# Altium PCB PCB1.PcbDoc
Units mil, origin at the board's own origin, x right, y up, seen from the top; angles counter-clockwise.
Board outline 1259.84 x 1615 mil, 2 copper layers (Top Layer, Bottom Layer); 48 components, 45 nets, 176 pads, 33 vias.
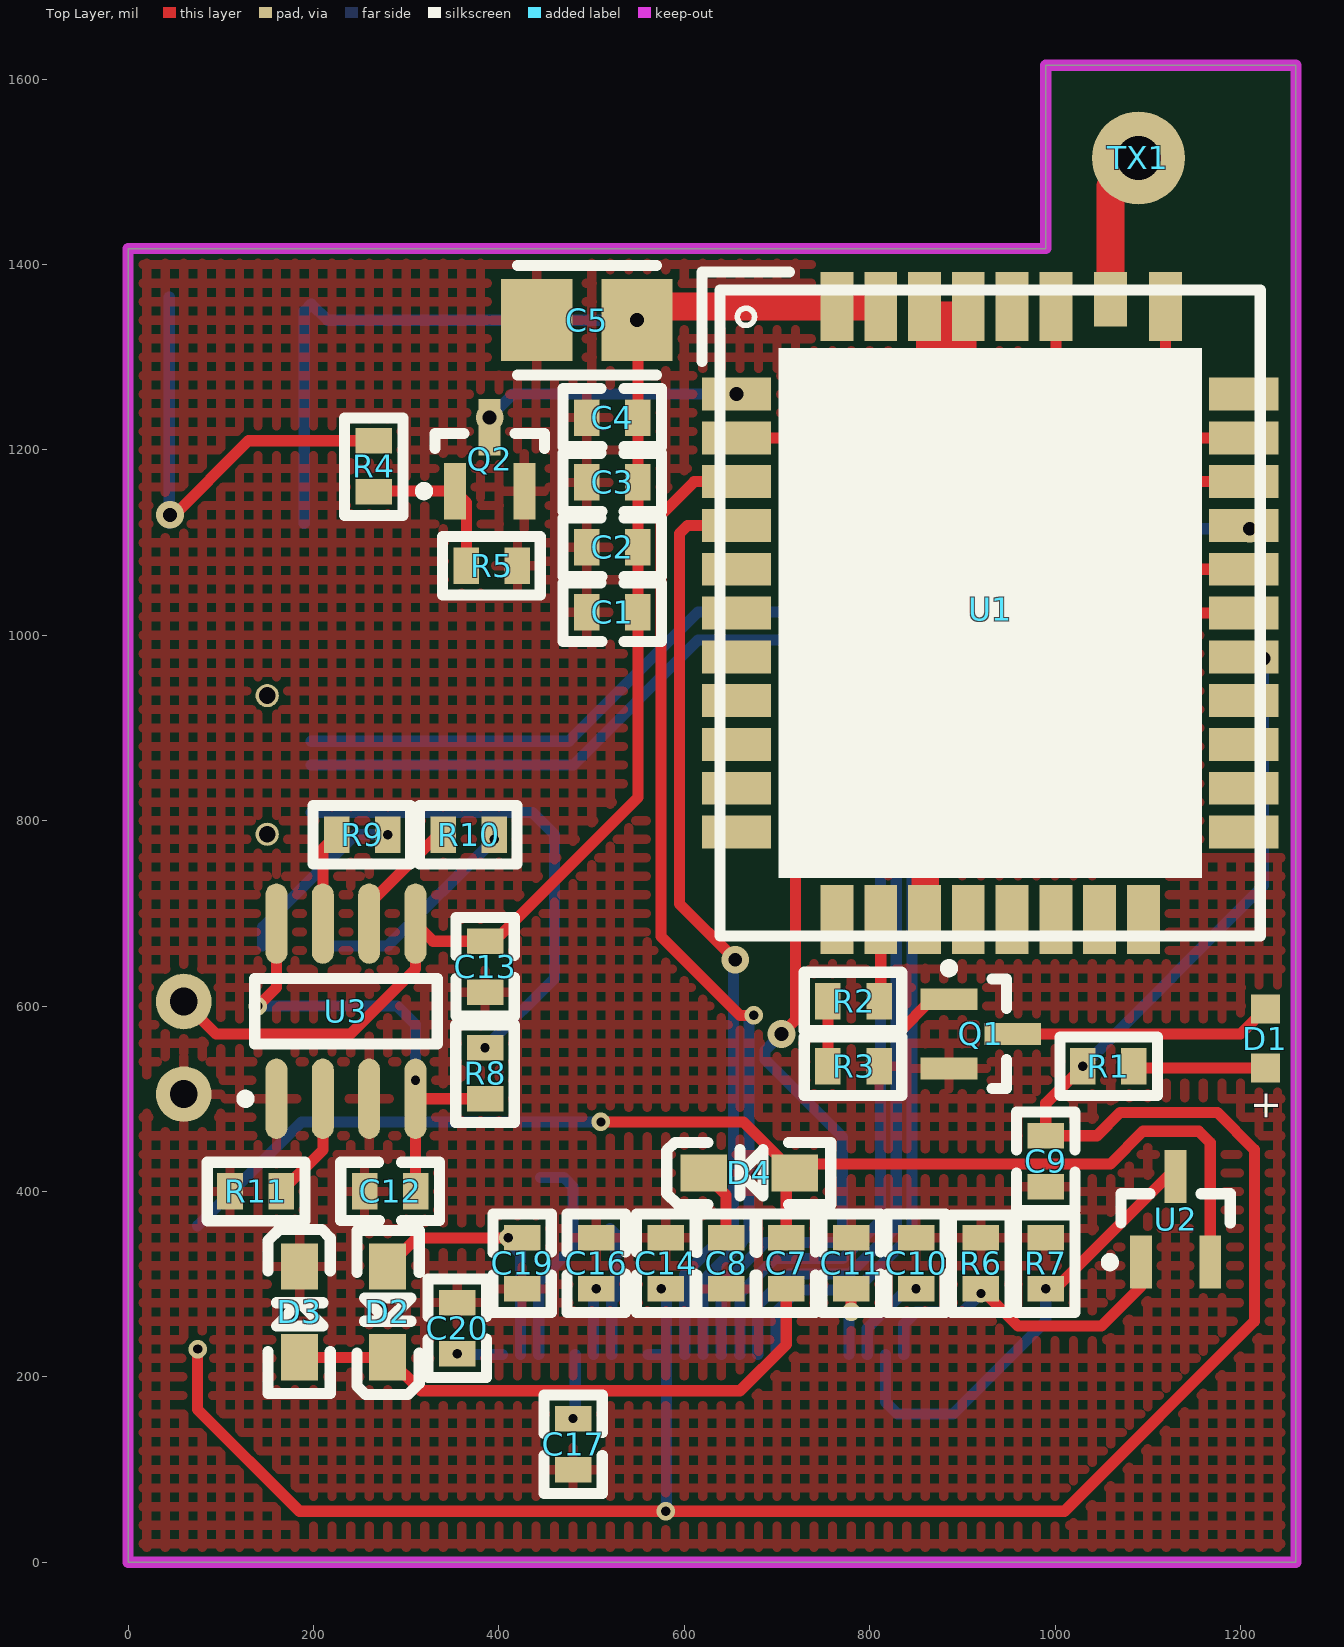
[diagram p0: Top Layer view]
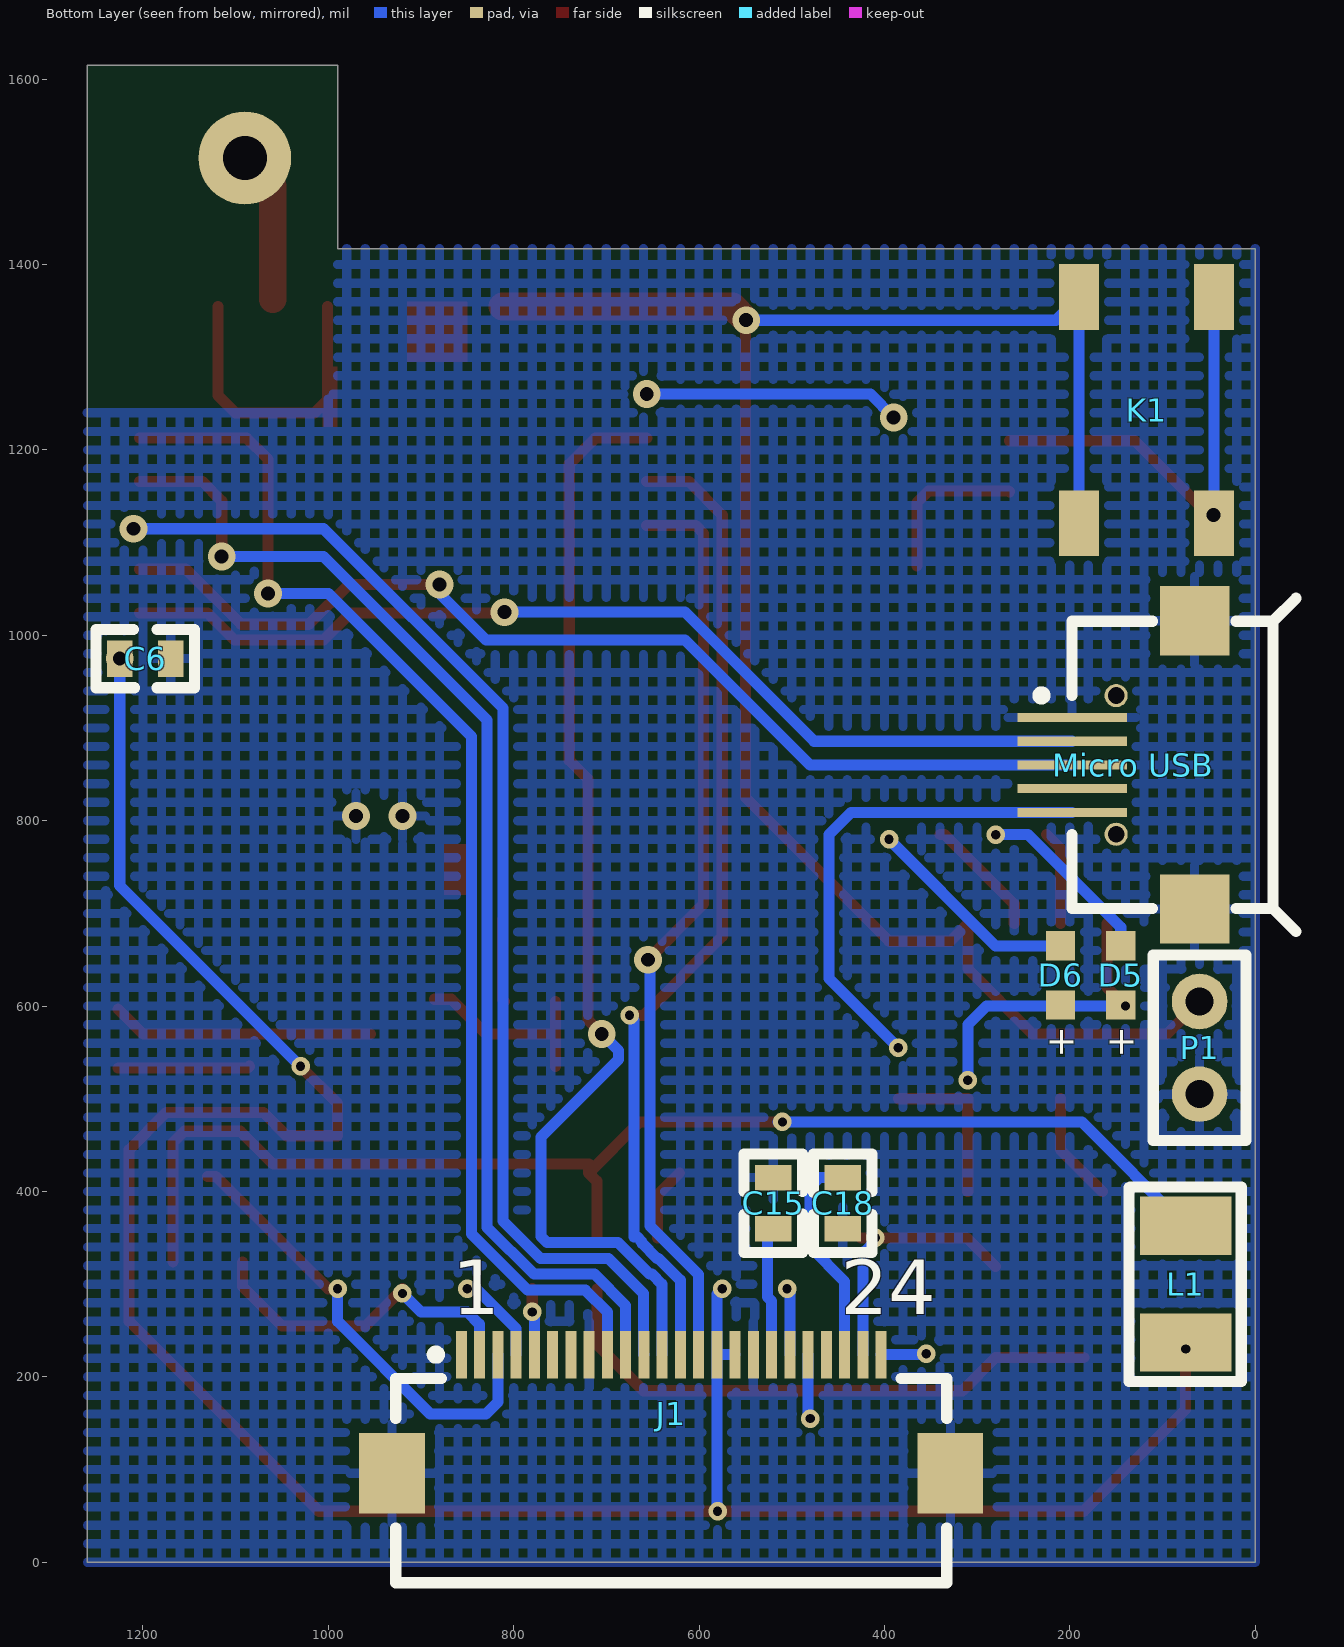
[diagram p1: Bottom Layer view, seen from below]
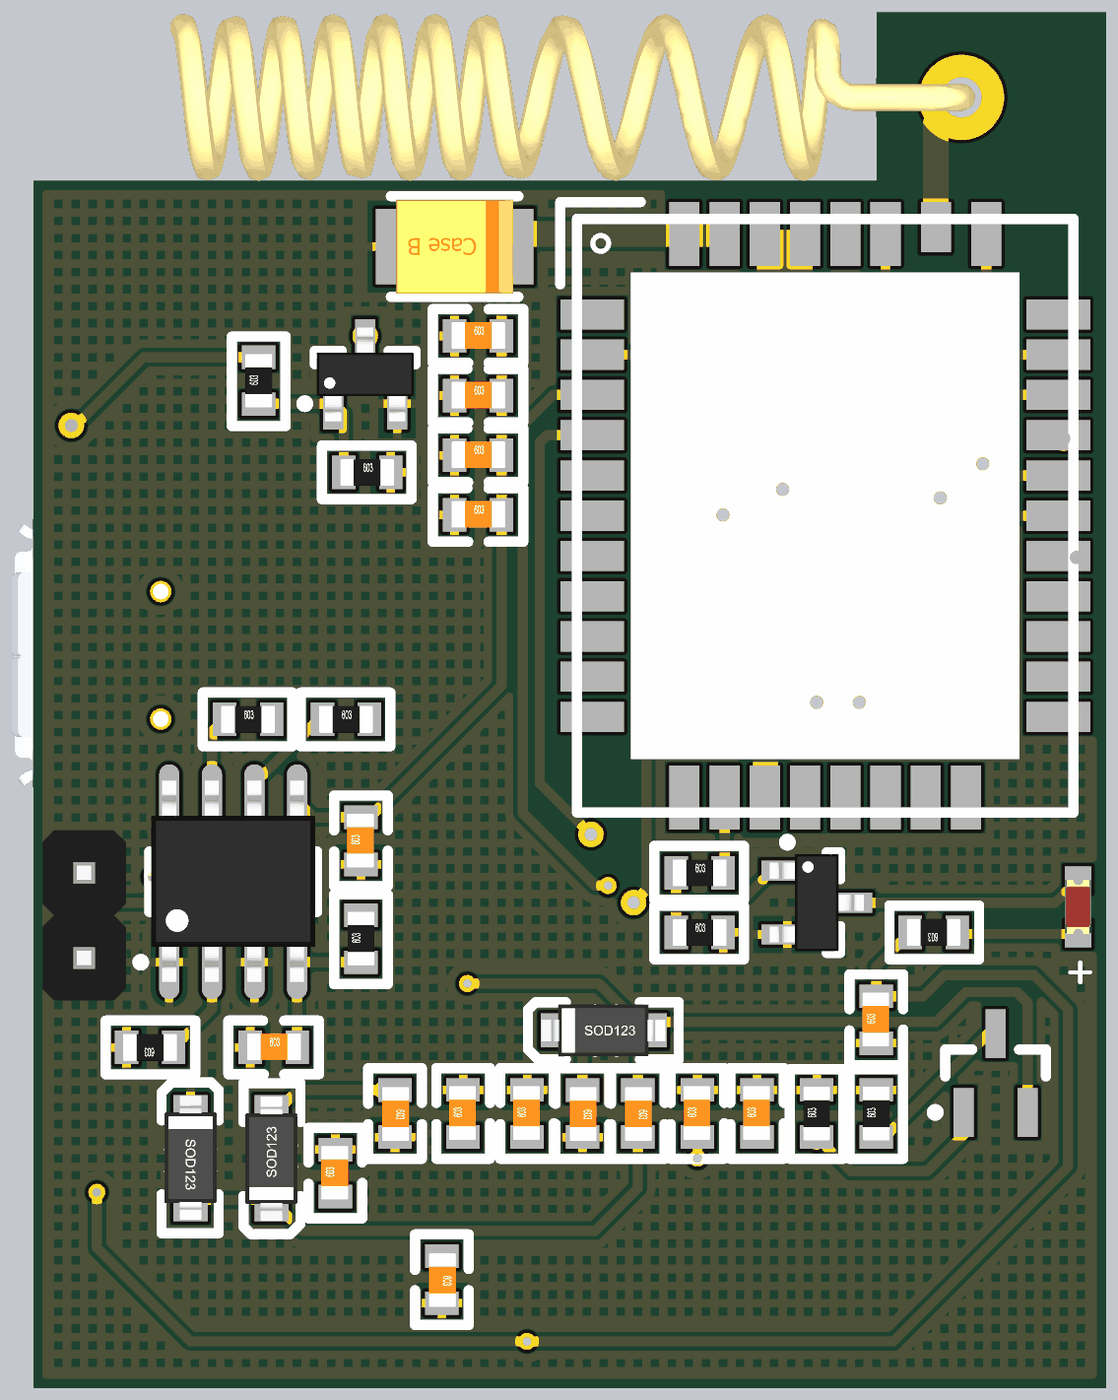
[diagram p2: 3D render of the assembled board from above, using the file's embedded part models]
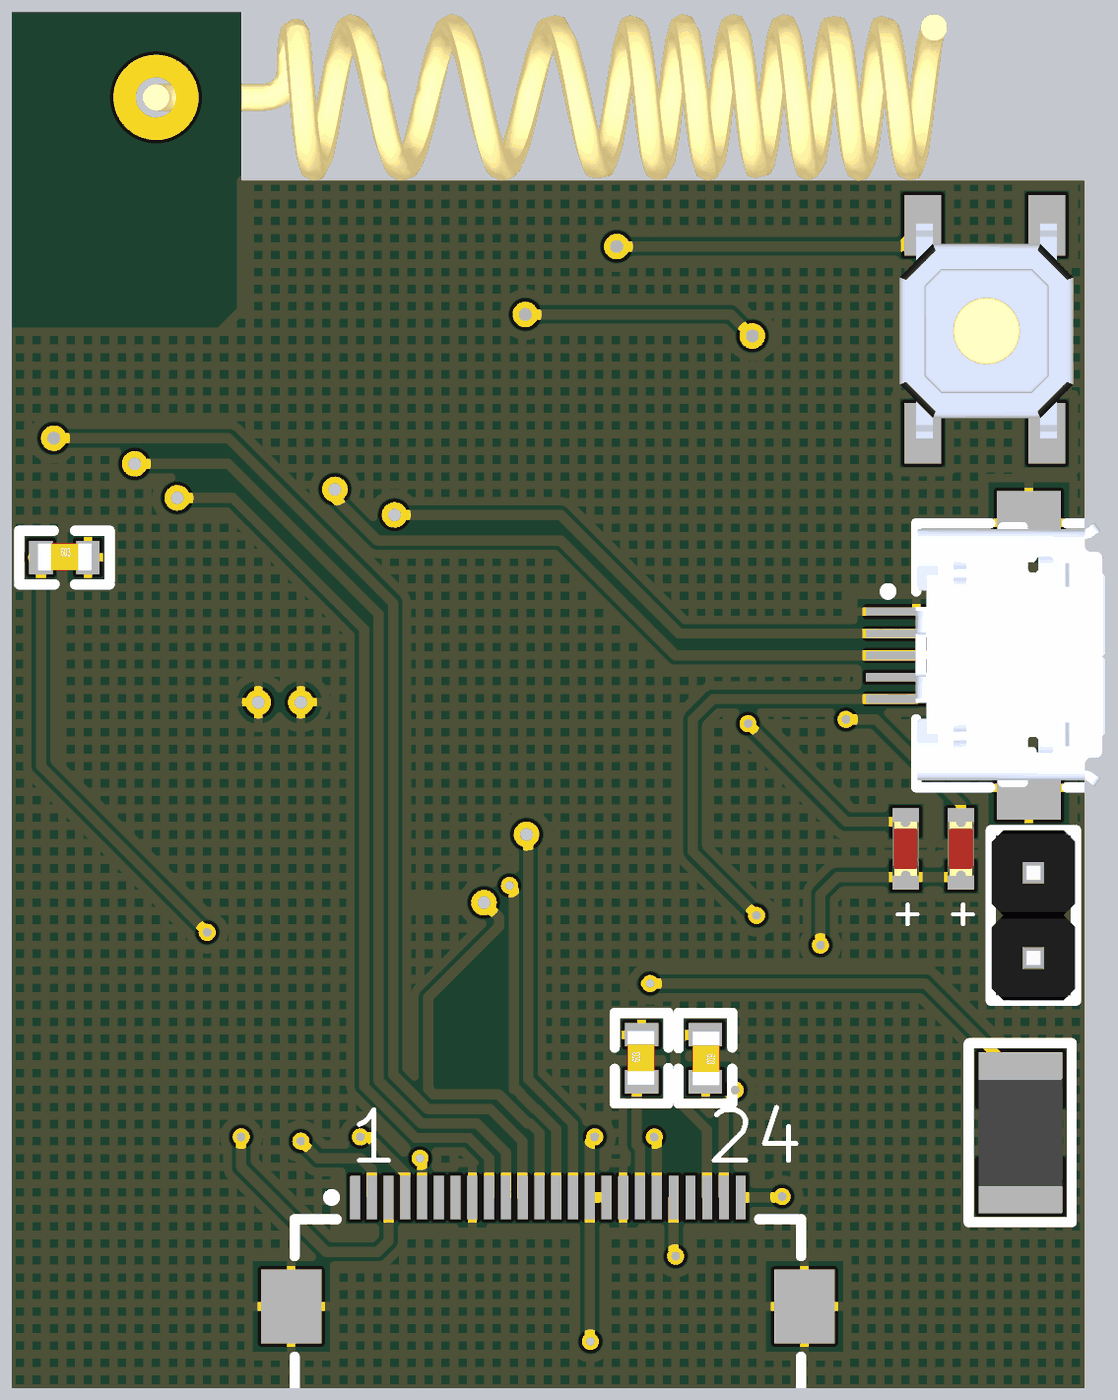
[diagram p3: 3D render of the assembled board from below, using the file's embedded part models]

## Layer stack, top to bottom
Top Solder: solder mask 0.4, Solder Resist, Dk 3.5
Top Layer: signal copper 1.4
Dielectric 1: dielectric 12.6, FR-4, Dk 4.8
Bottom Layer: signal copper 1.4
Bottom Solder: solder mask 0.4, Solder Resist, Dk 3.5

## Board outline
0,0 0,1417.32 990,1417.32 990,1615 1259.84,1615 1259.84,0

## Design rules (kind name [scope] priority, off if disabled: settings)
Clearance [All] p1: gap=5
ComponentClearance [All] p1: gap=5 collisioncheckmode=3 verticalgap=10 showdistances=FALSE
MinimumSolderMaskSliver [All] p1: minsoldermaskwidth=1
PolygonConnect [All] p1: connectstyle=Relief reliefconductorwidth=10 reliefentries=4 polygonreliefangle="90 Angle" airgapwidth=10
RoutingVias [All] p1: holewidth=28 width=50 viastyle="Through Hole" minholewidth=10 minwidth=50 maxholewidth=28 maxwidth=50
SilkToSilkClearance [All] p1: silktosilkclearance=0
SilkToSolderMaskClearance [IsPad] p1: minsilkscreentomaskgap=0 clearancetoexposedcopper=TRUE
SolderMaskExpansion [All] p1: expansion=4
Width [All] p1: maxlimit=50 minlimit=10 preferedwidth=12
26 further rules are at their usual default settings.

## Components (designator, comment, footprint, x,y, rotation, side; value= is the part's Value field where it differs from the comment)
C1 "无极性电容" 0603AC 494.88,1025 r0 top
C2 "无极性电容" 0603AC 494.88,1095 r0 top
C3 "无极性电容" 0603AC 494.88,1165 r0 top
C4 "无极性电容" 0603AC 494.88,1235 r0 top
C5 "贴片铝/钽电容" CAPM-B-3528X21N 495,1340 r180 top
C6 "无极性电容" 0603AC 1225,975 r180 bottom
C7 "无极性电容" 0603AC 710,350 r270 top
C8 "无极性电容" 0603AC 645,350 r270 top
C9 "无极性电容" 0603AC 990,405 r90 top
C10 "无极性电容" 0603AC 850,295 r90 top
C11 "无极性电容" 0603AC 780,295 r90 top
C12 "无极性电容" 0603AC 255,400 r0 top
C13 "无极性电容" 0603AC 385,614.88 r90 top
C14 "无极性电容" 0603AC 580,295 r90 top
C15 "无极性电容" 0603AC 520,359.88 r90 bottom
C16 "无极性电容" 0603AC 505,295 r90 top
C17 "无极性电容" 0603AC 480,155 r270 top
C18 "无极性电容" 0603AC 445,415 r270 bottom
C19 "无极性电容" 0603AC 425,350 r270 top
C20 "无极性电容" 0603AC 355,225 r90 top
D1 "LED-贴片" LED_0603 1225,520 r90 top
D2 "MBR0530" SOD123 280,270 r270 top
D3 "MBR0530" SOD123 185,270 r90 top
D4 "MBR0530" SOD123 670,420 r180 top
D5 "LED-贴片-直插" LED_0603 146.99,588.1 r90 bottom
D6 "LED-贴片-直插" LED_0603 211.99,588.1 r90 bottom
J1 "CL586-0555-2" FH12-24S-0.5SH 630,160 r180 bottom
K1 "KEY" KEY_4*4 190,1120.91 r90 bottom
L1 "LND" 3225 75,300 r90 bottom
"Micro USB" "Micro USB-B" "Micro USB" -19.29,860.2 r90 bottom
P1 "Header 2" "Header 2" 60,555 r90 bottom
Q1 "NPN" SOT95P230X110-3N 920,570 r0 top
Q2 "NPN" SOT95P230X110-3N 390,1190 r90 top
R1 "贴片电阻" 0603AR 1085,535.06 r180 top
R2 "贴片电阻" 0603AR 755,605 r0 top
R3 "贴片电阻" 0603AR 755,535 r0 top
R4 "贴片电阻" 0603AR 265,1154.88 r90 top
R5 "贴片电阻" 0603AR 364.88,1075 r0 top
R6 "贴片电阻" 0603AR 920,295 r90 top
R7 "贴片电阻" 0603AR 990,295 r90 top
R8 "贴片电阻" 0603AR 385,500 r90 top
R9 "贴片电阻" 0603AR 225,785 r0 top
R10 "贴片电阻" 0603AR 339.88,785 r0 top
R11 "贴片电阻" 0603AR 165,400 r180 top
TX1 "GSM/GPRS/3G弹簧天线" GSM/GPRS/3G弹簧天线 1090,1515 r180 top
U1 "A6391_A11" A6391_A11 638.66,675.63 r0 top
U2 "Si1304BDL" AO3400 1130,370 r90 top
U3 "TP4056" SOP8LM386 160,500 r90 top

## Footprints (in the part's own frame and the unit in brackets; to place one, negate y for a bottom-side part, rotate by r counter-clockwise, add the part's x,y. Pads: shape width x height; smd on the part's side, far side on the other; paste and mask are expansions set on the pad)
0603AC [mm]
  rect 0.7x1 smd: 1(0,0) 2(1.4,0)
  silkscreen extent -0.65,-0.8 2.05,0.8, body extent -0.09,-0.38 1.51,0.42, height 0.3
0603AR [mm]
  rect 0.7x1 smd: 1(0,0) 2(1.4,0)
  silkscreen extent -0.65,-0.8 2.02,0.8, body extent -0.1,-0.4 1.5,0.4, height 0.3
3225 [mm]
  rect 1.6x2.5 smd: 1(-1.6,0) 2(1.6,0)
  silkscreen extent -2.67,-1.52 2.67,1.55, body extent -1.6,-1.25 1.6,1.25, height 2
A6391_A11 [mm]
  rect 1.9x0.9 smd: 1(0.45,14.85) 2(0.45,13.65) 3(0.45,12.45) 4(0.45,11.25) 5(0.45,10.05) 6(0.45,8.85) 7(0.45,7.65) 8(0.45,6.45) 9(0.45,5.25) 10(0.45,4.05) 11(0.45,2.85) 20(14.35,2.85) 21(14.35,4.05) 22(14.35,5.25) 23(14.35,6.45) 24(14.35,7.65) 25(14.35,8.85) 26(14.35,10.05) 27(14.35,11.25) 28(14.35,12.45) 29(14.35,13.65) 30(14.35,14.85)
  rect 0.9x1.9 smd: 12(3.2,0.45) 13(4.4,0.45) 14(5.6,0.45) 15(6.8,0.45) 16(8,0.45) 17(9.2,0.45) 18(10.4,0.45) 19(11.6,0.45) 31(12.2,17.25) 33(9.2,17.25) 34(8,17.25) 35(6.8,17.25) 36(5.6,17.25) 37(4.4,17.25) 38(3.2,17.25)
  rect 0.9x1.5 smd: 32(10.7,17.45)
  rect 1.5x1.5 smd: 39(3.2,2.85) 40(11.6,2.85) 41(7.4,7.35)
  Top Layer pour cut-out: 169 vertices and 0 holes, not listed, extent 9.5,15.8 11.9,18.2
  Top Layer pour cut-out: 13.2,15.5 15.5,15.5 15.5,2.2 13.2,2.2
  Top Layer pour cut-out: 2.5,1.6 12.3,1.6 12.3,-0.7 2.5,-0.7
  Top Layer pour cut-out: -0.7,15.5 1.6,15.5 1.6,2.2 -0.7,2.2
  Top Layer pour cut-out: 2.6,18.4 8.7,18.4 8.7,16.1 2.6,16.1
  silkscreen extent -0.5,0 14.8,18.2
AO3400 [mm]
  rect 1.45x0.6 smd: 1(-1.175,0.95) 2(-1.175,-0.95) 3(1.175,0)
  silkscreen extent -1.3,-1.5 0.7,1.92, body extent -0.7,-1.5 0.7,1.5, height 1.1
CAPM-B-3528X21N [mm] "Molded Capacitor, 2-Leads, Body 3.50x2.80mm, IPC Medium Density"
  rect 1.95x2.25 smd: 1(-1.375,0) 2(1.375,0)
  silkscreen extent -1.9,-1.5 1.9,1.5, body extent -1.75,-1.4 1.75,1.4, height 1.9
FH12-24S-0.5SH [mm] "Connector; FH12 Series; 24 Position; 0.5mm Spaced Bottom Contact"
  rect 0.3x1.3 smd: 1(-5.75,1.625) 2(-5.25,1.625) 3(-4.75,1.625) 4(-4.25,1.625) 5(-3.75,1.625) 6(-3.25,1.625) 7(-2.75,1.625) 8(-2.25,1.625) 9(-1.75,1.625) 10(-1.25,1.625) 11(-0.75,1.625) 12(-0.25,1.625) 13(0.25,1.625) 14(0.75,1.625) 15(1.25,1.625) 16(1.75,1.625) 17(2.25,1.625) 18(2.75,1.625) 19(3.25,1.625) 20(3.75,1.625) 21(4.25,1.625) 22(4.75,1.625) 23(5.25,1.625) 24(5.75,1.625)
  rect 1.8x2.2 smd: 25(-7.65,-1.625) 26(7.65,-1.625)
  silkscreen extent -7.55,-4.62 7.55,1.75
GSM/GPRS/3G弹簧天线 [mm]
  round 2.54 hole 1.2: 1(0,0)
  body extent -0.4,-2.49 23.59,2.49, height 2.96
"Header 2" [mil]
  round 60 hole 30: 1(-50,0) 2(50,0)
  silkscreen extent -100,-50 100,50, body extent -100,-49 100,49, height 285
KEY_4*4 [mm]
  rect 1.8x1.1 smd: 1(0,0) 1(6.2,0) 2(0,-3.7) 2(6.2,-3.7)
  body extent -0.15,-4.5 6.25,0.7, height 1.5
LED_0603 [mm]
  rect 0.8x0.8 smd: 1(0.333,-0.051) 2(1.953,-0.051)
  body extent 0.33,-0.45 1.95,0.35, height 0.6
"Micro USB" [mm]
  rect 0.25x3 smd: 0(-0.65,5.508) 1(-1.3,5.508) 2(0.65,5.508) 3(0,5.508) 4(1.3,5.508)
  round 0.635 hole 0.457 unplated: MH1(1.9,4.3) MH2(-1.9,4.3)
  rect 1.9x1.9 smd: ""(-3.95,2.15) ""(3.95,2.15)
  silkscreen extent -4.57,-0.63 4.57,6.47, body extent -3.94,-0.14 3.98,5.52, height 3.09
SOD123 [mil]
  rect 50x40 smd: 1(-49,0) 2(49,0)
  silkscreen extent -88,-33 89,34, body extent -72,-31 73,31, height 53
SOP8LM386 [mm]
  oval 2.2x0.6 smd: 1(0,0) 2(0,-1.27) 3(0,-2.54) 4(0,-3.81) 5(4.8,-3.81) 6(4.8,-2.54) 7(4.8,-1.27) 8(4.8,0)
  silkscreen extent -0.12,-4.41 3.3,0.97, body extent -0.59,-4.36 5.41,0.55, height 1.75
SOT95P230X110-3N [mm] "SOT23, 3-Leads, Body 2.92x2.30mm, Pitch 0.95mm, IPC Medium Density"
  rect 1.55x0.6 smd: 1(-0.875,0.95) 2(-0.875,-0.95) 3(0.875,0)
  silkscreen extent -1,-1.5 0.7,1.92, body extent -1.4,-1.45 1.4,1.45, height 1.3

## Part data
C1: "0603;0.1uF"
C2: "0603;33pF"
C3: "0603;18pF"
C4: "0603;22pF"
C5: "Polarized Capacitor (Axial)"
C6: "0603;1uF"
C7 C8 C9 C10 C11 C12 C13 C14 C15 C16 C17 C18 C19 C20: "Capacitor"
D1: library part LED-贴片-直插, "0603;LED"
D2 D3 D4: library part 二极管
J1: "FH12 Series, \"Flip-Lock\" SMT/ZIF Connector - 0.5mm Spaced Top Contact"
P1: library part "Header 2_1", "DIP 2.54"
Q1 Q2: library part NPN_1, "NPN;SOT95P230X110-3N"
R1: "0603;1K"
R2 R4: "0603;4.7K"
R3 R5 R6 R7: "0603;10K"
R8 R9 R10 R11: "Resistor"
U1: "202оƬ"
U2: library part AO3400

## Via types
v1: diameter 20, hole 10, Top Layer to Bottom Layer, 19 vias
v2: diameter 30, hole 15, Top Layer to Bottom Layer, 14 vias

## Nets (pads, with @x,y where several pads share a name; then routed paths per layer and width w, separated by ;. In a path a pad name is that pad's centre, name@x,y a point inside that pad or via, vN(x,y) a via of type N, cw(c..) or ccw(c..) an arc to the next point about the centre after c; other vN are vias at no path point)
BS1: "Micro USB.4" "Micro USB." C1.1 C2.1 C3.1 C4.1 C5.2 C6.2 C8.2 C9.1 C10.2 C11.2 C12.1 C13.1 C14.2 C15.2 C16.2 C17.2 C18.2 C19.2 C20.2 D3.2 J1.8 J1.17 J1.25 J1.26 P1.1 Q1.2 Q2.2 R3.2 R5.2 R6.2 R7.2 R11.2 U1.14 U1.31 U1.33 U1.35 U1.36 U1.39 U1.40 U1.41 U3.1 U3.3 | length 328.2
  Top Layer w12: U1.33 1000.87,1254.13 1015,1240 1100,1240 1118.98,1258.98 U1.31
  other v2: 920,805 970,805
BUSY: J1.9 U1.29 | length 1340.4
  Top Layer w12: v2(1065,1045) 1065,1190 1088.03,1213.03 U1.29
  Bottom Layer w12: J1.9 698.9,269.86 722.83,293.79 785.17,293.79 845.61,354.22 845.61,890.61 1000,1045 v2(1065,1045)
CS#: J1.12 U1.2 | length 1213.3
  Top Layer w12: U1.2 711.97,1213.03 740,1185 740,865 720,845 720,585 v2(705,570)
  Bottom Layer w12: J1.12 639.84,299.84 650.79,310.79 653.62,310.79 687.62,344.79 764.04,344.79 770.49,351.23 770.49,458.77 687,542.26 687,552 v2(705,570)
D0: J1.13 U1.3 | length 1077.6
  Top Layer w12: U1.3 610.79,1165.79 575,1130 575,675 660,590 v1(675,590)
  Bottom Layer w12: J1.13 620.16,304.2 643.75,327.79 645.1,327.79 661.5,344.19 661.5,345.55 667.17,351.21 670,351.21 670,585 v1(675,590)
D1: J1.14 U1.4 | length 998.4
  Top Layer w12: v2(655,650) 595,710 595,1110 603.54,1118.54 U1.4
  Bottom Layer w12: J1.14 600.47,310.47 653,363 653,648 v2(655,650)
DC#: J1.11 U1.27 | length 1282.1
  Bottom Layer w12: J1.11 660,224.45 660,290 697.79,327.79 771.09,327.79 811.61,368.31 811.61,921.61 1005,1115 v2(1210,1115)
GDR: J1.2 R6.1 U2.1 | length 362.8
  Top Layer w12: R6.1 960,255 1050,255 1092.6,297.6 U2.1
  Bottom Layer w12: J1.2 836.69,256.69 850,270 900,270 v1(920,290)
HOST_RX: "Micro USB.2" U1.25 | length 1088.2
  Top Layer w12: v2(810,1025) 810.94,1024.06 975.94,1024.06 1005,995 1101.21,995 1130.27,1024.06 U1.25
  Bottom Layer w12: 197.56,885.79 475.79,885.79 615,1025 v2(810,1025)
HOST_TX: "Micro USB.3" U1.26 | length 1135
  Top Layer w12: v2(880,1055) 977.83,1055 1020.83,1012 1094.17,1012 1153.47,1071.3 U1.26
  Bottom Layer w12: 197.56,860.2 480.2,860.2 615,995 830,995 880,1045 v2(880,1055)
NC: J1.1
NET_LED: R2.2 U1.13 | length 89.1
  Top Layer w12: R2.2 811.89,606.77 U1.13
NetC7_1: C7.1 D4.1 L1.2 U2.2 | length 1398.7
  Top Layer w12: v1(510,475) 664,475 D4.1 ; C7.1 710,411 D4.1 ; U2.2 1167.4,452.6 1155,465 1095,465 1059.78,429.78 719,429.78 D4.1
  Bottom Layer w12: L1.2 187.01,475 v1@515,475
NetC7_2: C7.2 D2.2 D3.1 | length 620.5
  Top Layer w12: D3.1 D2.2 316,185 660,185 710,235 C7.2
NetC8_1: C8.1 D4.2 | length 79.9
  Top Layer w12: D4.2 645,396 C8.1
NetC12_2: C12.2 D5.1 D6.1 R8.1 U3.4 U3.8 | length 510.6
  Top Layer w12: v1(140,600) 160,620 U3.8 ; C12.2 310.12,499.88 U3.4 R8.1
  Bottom Layer w12: v1(140,600) 290,600 310,580 v1(310,520)
NetD1_1: D1.1 R1.1 | length 142.8
  Top Layer w12: R1.1 1086.94,533.12 D1.1
NetD1_2: D1.2 Q1.3 | length 283.7
  Top Layer w12: Q1.3 1200.09,570 D1.2
NetD5_2: D5.2 R9.2 | length 196.4
  Bottom Layer w12: D5.2 145,685 245,785 v1(280,785)
NetD6_2: D6.2 R10.2 | length 232.6
  Bottom Layer w12: D6.2 280,665 v1(395,780)
NetK1_2: K1.2 R4.2 | length 499.3
  Top Layer w12: v2@45,1125 130,1210 R4.2
  Bottom Layer w12: K1.2@44.33,1120.91 K1.2@44.33,1365
  other v2: 45,1130
NetQ1_1: Q1.1 R2.1 R3.1 | length 216
  Top Layer w12: R3.1 755,570 ; R2.1 755,570 ; Q1.1 867.4,607.4 830,570 755,570
NetQ2_1: Q2.1 R4.1 R5.1 | length 173.5
  Top Layer w12: R4.1 265.67,1155.55 Q2.1 364.88,1143.27 R5.1
NetR9_1: R9.1 U3.7 | length 102.2
  Top Layer w12: U3.7 210,770 R9.1
NetR10_1: R10.1 U3.6 | length 132
  Top Layer w12: U3.6 260,710 335,785 R10.1
NetR11_1: R11.1 U3.2 | length 118.6
  Top Layer w12: R11.1 210,445 U3.2
NetTX1_1: TX1.1 U1.32 | length 164.8
  Top Layer w30: U1.32 1059.92,1484.92 TX1.1
POWERKEY: Q2.3 U1.1 | length 276.8
  Bottom Layer w12: v2(390,1235) 415.28,1260.28 v2(656.38,1260.28)
PREVGH: J1.21
PREVGI: C19.1 D2.1 J1.23 | length 280
  Top Layer w12: D2.1 311,350 v1(410,350) C19.1
  Bottom Layer w12: v1@414.31,341.55 420.76,335.1 422.17,335.1 423.31,333.97 J1.23
RES#: J1.10 U1.28 | length 1301.4
  Top Layer w12: v2(1115,1085) 1115,1145 1135.79,1165.79 U1.28
  Bottom Layer w12: J1.10 679.21,277.04 712.96,310.79 778.13,310.79 828.61,361.27 828.61,908.61 1005,1085 v2(1115,1085)
RESE: J1.3 R7.1 U2.3 | length 496
  Top Layer w12: v1(990,295) 1000,295 1121.26,416.26 U2.3
  Bottom Layer w12: J1.3 817.01,172.99 830,160 890,160 990,260 v1(990,295)
SPK_N: U1.16
SPK_P: U1.17
TSCL: J1.6
TSDA: J1.7
VBAT: C1.2 C2.2 C3.2 C4.2 C5.1 C13.2 K1.1 P1.2 U1.37 U1.38 U3.5 | length 2037.3
  Top Layer w12: P1.2 95,570 240,570 310,640 U3.5 328.98,670 C13.2 395,670 550,825 C1.2 C2.2 C3.2 C4.2 550,1339.13 v2(549.13,1340)
  Top Layer w30: v2(549.13,1340) 563.9,1354.76 U1.38 U1.37
  Bottom Layer w12: K1.1@190,1120.91 190,1350 197.5,1357.5 215,1340 v2(549.13,1340)
VCI: C6.1 C9.2 C14.1 J1.15 J1.16 L1.1 R1.2 U1.24 | length 2647
  Top Layer w12: v1(75,230) 75,165 185,55 1010,55 1215,260 1215,445 1175,485 1070,485 1045.12,460.12 C9.2 990,495.18 v1(1029.88,535.06)
  Bottom Layer w12: J1.16 J1.15 ; v1(575,295) 580.79,289.21 J1.15 ; v1(580,55) 580.79,55.79 J1.15 ; v1(1029.88,535.06) 1225,730.18 v2(1225,975)
VCOM: C20.1 J1.24 | length 49
  Bottom Layer w12: v1(355,225) 356.02,223.98 J1.24
VDD: C15.1 J1.18 | length 140.2
  Bottom Layer w12: C15.1 526,353.88 526,286.3 521.73,282.03 J1.18
VGH: C11.1 J1.5 | length 77.3
  Top Layer w12: v1(780,270) C11.1
  Bottom Layer w12: J1.5 777.64,272.64 780,270.28 v1(780,270)
VGL: C10.1 J1.4 | length 98.7
  Bottom Layer w12: J1.4 797.32,252.32 840,295 v1(850,295)
VIN: "Micro USB.1" R8.2 | length 533.5
  Bottom Layer w12: 197.56,809.02 435.98,809.02 460,785 460,630 390,560 v1(385,555)
VPP: C16.1 J1.19 | length 72.2
  Bottom Layer w12: J1.19 502.05,292.05 v1(505,295)
VSH: C17.1 J1.20 | length 70
  Bottom Layer w12: v1(480,155) 482.36,157.36 J1.20
VSL: C18.1 J1.22 | length 235.5
  Bottom Layer w12: J1.22 442.99,302.99 480,340 480,405 470,415 C18.1
pads on no net: "Micro USB.0" "Micro USB.MH1" "Micro USB.MH2" U1.5 U1.6 U1.7 U1.8 U1.9 U1.10 U1.11 U1.12 U1.15 U1.18 U1.19 U1.20 U1.21 U1.22 U1.23 U1.30 U1.34

## Polygon pours and split planes (outlines as drawn)
BS1 on Top Layer "Top Layer-No Net" (hatched 90Degree grid 20 track 10, remove dead copper, pour order 12): 0,1417.32 990,1417.32 990,1265 1015,1240 1259.84,1240 1259.84,0 0,0
BS1 on Top Layer "Top Layer-No Net" (hatched 90Degree grid 20 track 10, remove dead copper, pour order 8): 0,1417.32 987.32,1417.32 990,1420 1000.87,1409.13 1000.87,1254.13 1015,1240 1100,1240 1255,1240 1260,1235 1259.84,1234.84 1259.84,0 0,0
BS1 on Bottom Layer "Top Layer-No Net" (hatched 90Degree grid 20 track 10, remove dead copper, pour order 10): 0,1417.32 990,1417.32 990,1265 1015,1240 1105,1240 1260,1240 1259.84,1239.84 1259.84,0 0,0

## Keep-outs
Top Layer:
  the board outline again, w12

## Other copper
Top Layer:
  rectangle net BS1: 845,720 875,775
  rectangle net BS1: 850,1295 915,1360
  rectangle net BS1: 990,1225 1006,1290

## Text inside footprints (layer, text, board x,y; h text height)
D1: Top Overlay "+" at 1241,510 h30 r90
D5: Bottom Overlay "+" at 130.99,578.1 h30 r270
D6: Bottom Overlay "+" at 195.99,578.1 h30 r270
J1: Bottom Overlay "1" at 866.22,267.28 h59.06; Bottom Overlay "24" at 446.93,267.28 h59.06